# Altium PCB Standard 60 01.PcbDoc
Units mil, origin at the board's own origin, x right, y up, seen from the top; angles counter-clockwise.
Board outline 11157.21 x 3737.43 mil, 2 copper layers (Top Layer, Bottom Layer); 138 components, 95 nets, 535 pads, 25 vias.
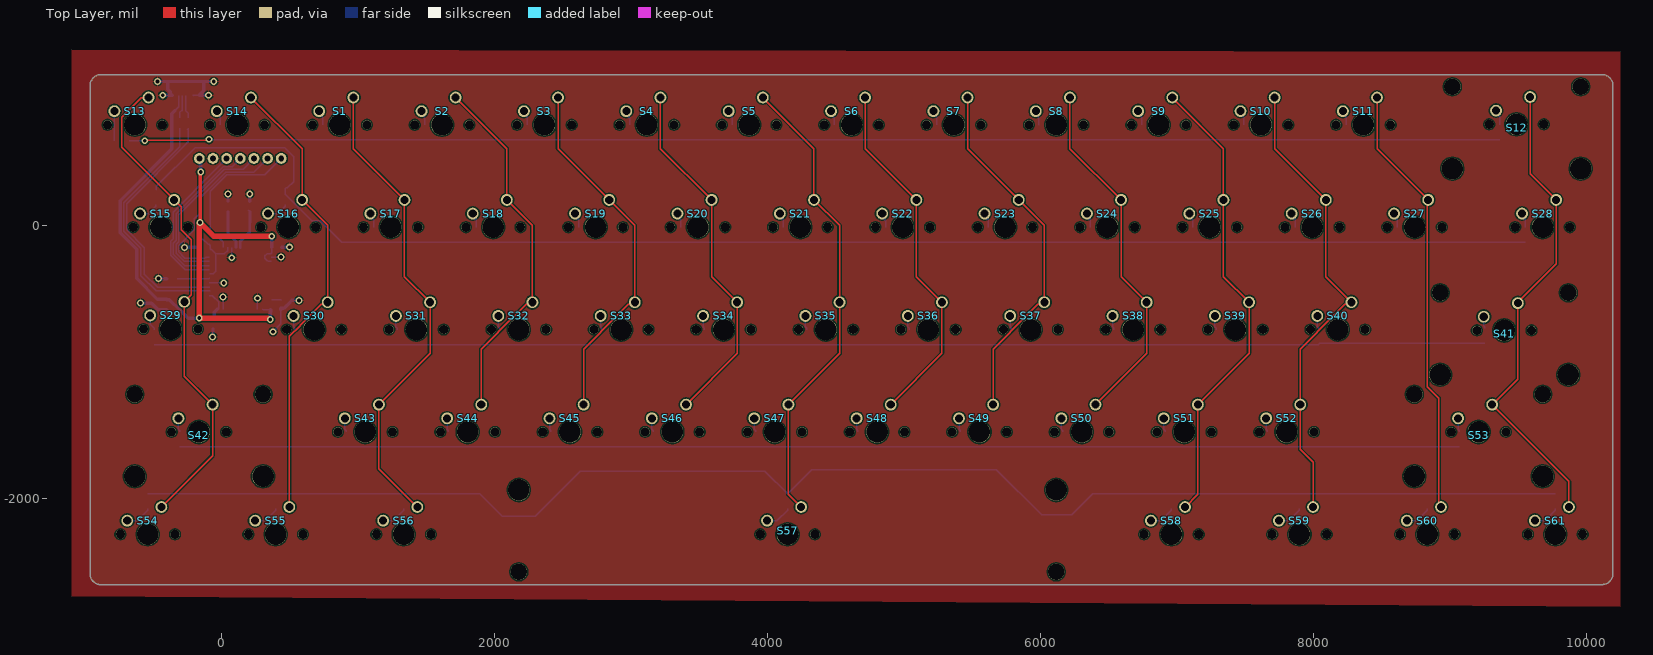
[diagram p0: Top Layer view]
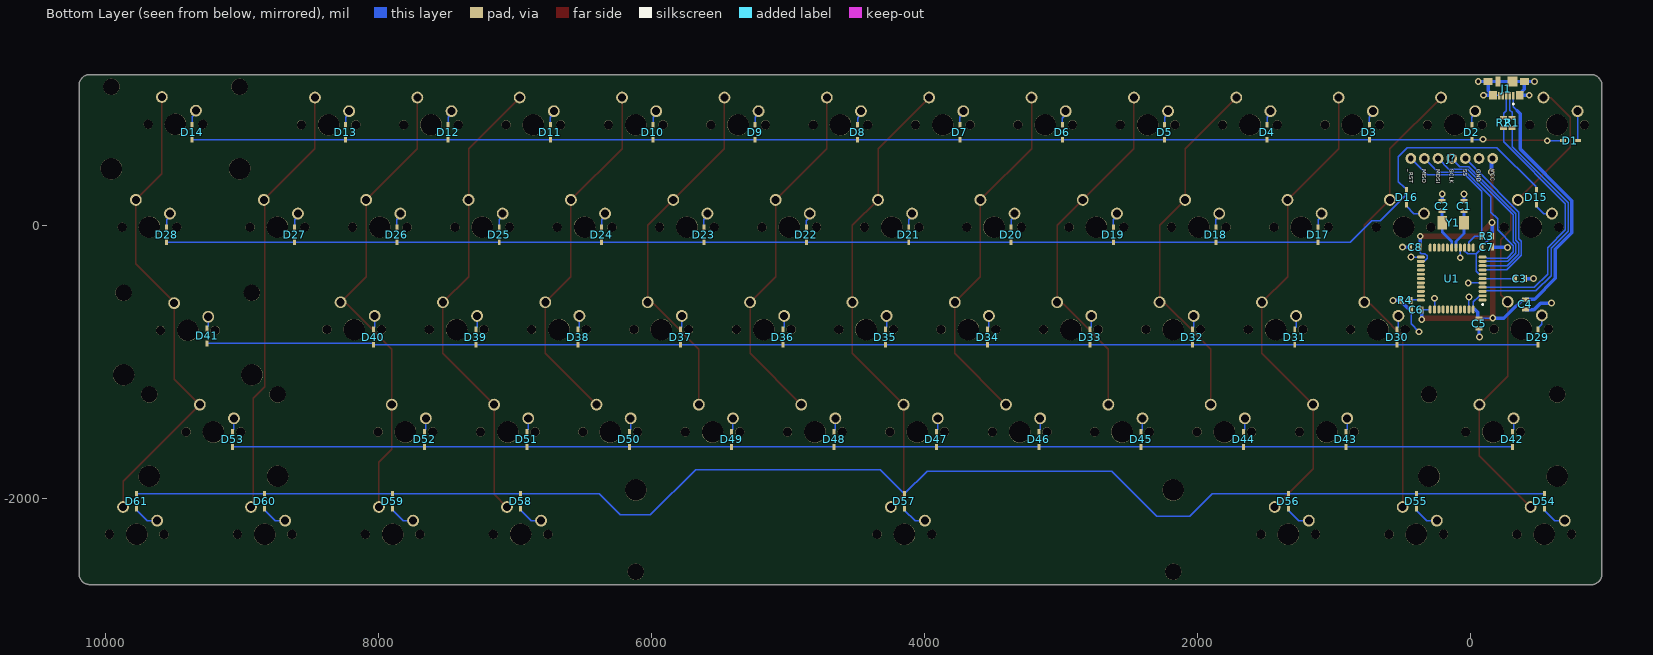
[diagram p1: Bottom Layer view, seen from below]

## Layer stack, top to bottom
Top Solder: solder mask 0.4, Solder Resist, Dk 3.5
Top Layer: signal copper 1.4
Dielectric 1: dielectric 12.6, FR-4, Dk 4.8
Bottom Layer: signal copper 1.4
Bottom Solder: solder mask 0.4, Solder Resist, Dk 3.5

## Board outline
-882.16,-2632.57 cw(c-882.16,-2553.83) -960.9,-2553.82 -960.15,1026.14 cw(c-881.41,1026.12) -881.41,1104.86 10117.57,1104.86 cw(c10117.57,1026.12) 10196.31,1026.12 10196.31,-2553.65 cw(c10117.57,-2553.65) 10117.57,-2632.39

## Design rules (kind name [scope] priority, off if disabled: settings)
Clearance [All] p1: gap=10 ignorepadtopadclearanceinfootprint=TRUE
ComponentClearance [All] p1: gap=10 collisioncheckmode=3 verticalgap=10 showdistances=FALSE donotcheckwithout3dbody=TRUE checkcomponentboundary=TRUE
DiffPairsRouting [All] p1: maxlimit=100 minlimit=10 mostfreqgap=15 toplayer_minwidth=10 toplayer_maxwidth=100 toplayer_prefwidth=15 bottomlayer_minwidth=10 bottomlayer_maxwidth=100 bottomlayer_prefwidth=15 maxuncoupledlength=500
PolygonConnect [All] p1: connectstyle=Relief reliefconductorwidth=10 reliefentries=4 polygonreliefangle="90 Angle" airgapwidth=10
RoutingVias [All] p1: holewidth=27.56 width=47.24 viastyle="Through Hole" minholewidth=19.68 minwidth=39.37 maxholewidth=39.37 maxwidth=59.06
SolderMaskExpansion [All] p1: expansion=4 istentingtop=FALSE
Width [All] p1: maxlimit=1000 minlimit=10 preferedwidth=25
28 further rules are at their usual default settings.

## Classes and differential pairs
net class ROW[5..1]: ROW1 ROW2 ROW3 ROW4 ROW5
net class COL[14..1]: COL1 COL2 COL3 COL4 COL5 COL6 COL7 COL8 COL9 COL10 COL11 COL12 COL13 COL14
component class MCU: C1 C2 C3 C4 C5 C6 C7 C8 J? R1 R2 R3 R4 U1 Y1
component class matrix: D1 D2 D3 D4 D5 D6 D7 D8 D9 D10 D11 D12 D13 D14 D15 D16 D17 D18 D19 D20 D21 D22 D23 D24 D25 D26 D27 D28 D29 D30 D31 D32 D33 D34 D35 D36 D37 D38 D39 D40 D41 D42 D43 D44 D45 D46 D47 D48 D49 D50 D51 D52 D53 D54 D55 D56 D57 D58 D59 D60 D61 S1 S2 S3 S4 S5 S6 S7 S8 S9 S10 S11 S12 S13 S14 S15 S16 S17 S18 S19 S20 S21 S22 S23 S24 S25 S26 S27 S28 S29 S30 S31 S32 S33 S34 S35 S36 S37 S38 S39 S40 S41 S42 S43 S44 S45 S46 S47 S48 S49 S50 S51 S52 S53 S54 S55 S56 S57 S58 S59 S60 S61
differential pair XT: +XT_P -XT_N
differential pair DP: +DP_P -DP_N
differential pair DP1: +DP1_P -DP1_N

## Components (designator, comment, footprint, x,y, rotation, side; value= is the part's Value field where it differs from the comment)
C1 "Cap" 0805 50,140 r270 bottom value=22pf
C2 "Cap" 0805 210,140 r270 bottom value=22pf
C3 "Cap" 0805 -360,-390 r0 bottom value=1uf
C4 "Cap" 0805 -400,-580 r90 bottom value=10uf
C5 "Cap" 0805 -60,-720 r90 bottom value=0.1uf
C6 "Cap" 0805 400,-620 r180 bottom value=0.1uf
C7 "Cap" 0805 -117.5,-160 r0 bottom value=0.1uf
C8 "Cap" 0805 407.5,-160 r180 bottom value=0.1uf
D1 "Diode" SOD-323F -730,620 r180 bottom
D2 "Diode" SOD-323F -6.94,681.18 r90 bottom
D3 "Diode" SOD-323F 743.06,681.18 r90 bottom
D4 "Diode" SOD-323F 1493.06,681.18 r90 bottom
D5 "Diode" SOD-323F 2243.06,681.18 r90 bottom
D6 "Diode" SOD-323F 2993.06,681.18 r90 bottom
D7 "Diode" SOD-323F 3743.06,681.18 r90 bottom
D8 "Diode" SOD-323F 4493.06,681.18 r90 bottom
D9 "Diode" SOD-323F 5243.06,681.18 r90 bottom
D10 "Diode" SOD-323F 5993.06,681.18 r90 bottom
D11 "Diode" SOD-323F 6743.06,681.18 r90 bottom
D12 "Diode" SOD-323F 7493.06,681.18 r90 bottom
D13 "Diode" SOD-323F 8243.06,681.18 r90 bottom
D14 "Diode" SOD-323F 9368.06,681.18 r90 bottom
D15 "Diode" SOD-323F -480,204.88 r270 bottom
D16 "Diode" SOD-323F 470,204.88 r270 bottom
D17 "Diode" SOD-323F 1118.03,-68.82 r90 bottom
D18 "Diode" SOD-323F 1868.03,-68.82 r90 bottom
D19 "Diode" SOD-323F 2618.03,-68.82 r90 bottom
D20 "Diode" SOD-323F 3368.03,-68.82 r90 bottom
D21 "Diode" SOD-323F 4118.03,-68.82 r90 bottom
D22 "Diode" SOD-323F 4868.03,-68.82 r90 bottom
D23 "Diode" SOD-323F 5618.03,-68.82 r90 bottom
D24 "Diode" SOD-323F 6368.03,-68.82 r90 bottom
D25 "Diode" SOD-323F 7118.03,-68.82 r90 bottom
D26 "Diode" SOD-323F 7868.03,-68.82 r90 bottom
D27 "Diode" SOD-323F 8618.03,-68.82 r90 bottom
D28 "Diode" SOD-323F 9555.52,-68.82 r90 bottom
D29 "Diode" SOD-323F -491.35,-818.82 r90 bottom
D30 "Diode" SOD-323F 539.9,-818.82 r90 bottom
D31 "Diode" SOD-323F 1289.9,-818.82 r90 bottom
D32 "Diode" SOD-323F 2039.9,-818.82 r90 bottom
D33 "Diode" SOD-323F 2789.9,-818.82 r90 bottom
D34 "Diode" SOD-323F 3539.9,-818.82 r90 bottom
D35 "Diode" SOD-323F 4289.9,-818.82 r90 bottom
D36 "Diode" SOD-323F 5039.9,-818.82 r90 bottom
D37 "Diode" SOD-323F 5789.9,-818.82 r90 bottom
D38 "Diode" SOD-323F 6539.9,-818.82 r90 bottom
D39 "Diode" SOD-323F 7289.9,-818.82 r90 bottom
D40 "Diode" SOD-323F 8039.9,-818.82 r90 bottom
D41 "Diode" SOD-323F 9258.65,-810.58 r90 bottom
D42 "Diode" SOD-323F -303.85,-1568.82 r90 bottom
D43 "Diode" SOD-323F 914.9,-1568.82 r90 bottom
D44 "Diode" SOD-323F 1664.9,-1568.82 r90 bottom
D45 "Diode" SOD-323F 2414.9,-1568.82 r90 bottom
D46 "Diode" SOD-323F 3164.9,-1568.82 r90 bottom
D47 "Diode" SOD-323F 3914.9,-1568.82 r90 bottom
D48 "Diode" SOD-323F 4664.9,-1568.82 r90 bottom
D49 "Diode" SOD-323F 5414.9,-1568.82 r90 bottom
D50 "Diode" SOD-323F 6164.9,-1568.82 r90 bottom
D51 "Diode" SOD-323F 6914.9,-1568.82 r90 bottom
D52 "Diode" SOD-323F 7664.9,-1568.82 r90 bottom
D53 "Diode" SOD-323F 9071.15,-1568.82 r90 bottom
D54 "Diode" SOD-323F -538.23,-2021.09 r270 bottom
D55 "Diode" SOD-323F 399.27,-2021.09 r270 bottom
D56 "Diode" SOD-323F 1336.77,-2021.09 r270 bottom
D57 "Diode" SOD-323F 4149.27,-2021.09 r270 bottom
D58 "Diode" SOD-323F 6961.77,-2021.09 r270 bottom
D59 "Diode" SOD-323F 7899.27,-2021.09 r270 bottom
D60 "Diode" SOD-323F 8836.77,-2021.09 r270 bottom
D61 "Diode" SOD-323F 9774.27,-2021.09 r270 bottom
J1 "Molex 473460001" "MOLEX 47346 0001" -260,1040 r0 bottom
J? "ISP HEADER" "SPI HEADER" -160,490 r270 bottom
R1 "Res" 0805 -302.99,750 r270 bottom value=22
R2 "Res" 0805 -240,750 r270 bottom value=22
R3 "Res" 0805 -117.5,-80 r0 bottom value=10k
R4 "Res" 0805 480,-550 r0 bottom value=10k
S1 "1u" MX1U 868.06,736.3 r0 top
S2 "1u" MX1U 1618.03,736.3 r0 top
S3 "1u" MX1U 2368.06,736.3 r0 top
S4 "1u" MX1U 3118.06,736.3 r0 top
S5 "1u" MX1U 3868.06,736.3 r0 top
S6 "1u" MX1U 4618.06,736.3 r0 top
S7 "1u" MX1U 5368.02,736.3 r0 top
S8 "1u" MX1U 6118.06,736.3 r0 top
S9 "1u" MX1U 6868.02,736.3 r0 top
S10 "1u" MX1U 7618.06,736.3 r0 top
S11 "1u" MX1U 8368.06,736.3 r0 top
S12 "2u" MX2U 9490,740 r0 top
S13 "1u" MX1U -631.94,736.3 r0 top
S14 "1u" MX1U 118.06,736.3 r0 top
S15 "1u" MX1U -444.42,-13.7 r0 top
S16 "1u" MX1U 493.03,-13.7 r0 top
S17 "1u" MX1U 1243.06,-13.7 r0 top
S18 "1u" MX1U 1993.06,-13.7 r0 top
S19 "1u" MX1U 2743.06,-13.7 r0 top
S20 "1u" MX1U 3493.02,-13.7 r0 top
S21 "1u" MX1U 4243.03,-13.7 r0 top
S22 "1u" MX1U 4993.02,-13.7 r0 top
S23 "1u" MX1U 5743.06,-13.7 r0 top
S24 "1u" MX1U 6493.06,-13.7 r0 top
S25 "1u" MX1U 7243.02,-13.7 r0 top
S26 "1u" MX1U 7993.06,-13.7 r0 top
S27 "1u" MX1U 8743.02,-13.7 r0 top
S28 "1u" MX1U 9680.52,-13.7 r0 top
S29 "1u" MX1U -370,-760 r0 top
S30 "1u" MX1U 680.59,-763.73 r0 top
S31 "1u" MX1U 1430.5,-763.73 r0 top
S32 "1u" MX1U 2180.53,-763.73 r0 top
S33 "1u" MX1U 2930.53,-763.73 r0 top
S34 "1u" MX1U 3680.52,-763.73 r0 top
S35 "1u" MX1U 4430.52,-763.73 r0 top
S36 "1u" MX1U 5180.52,-763.73 r0 top
S37 "1u" MX1U 5930.58,-763.73 r0 top
S38 "1u" MX1U 6680.52,-763.73 r0 top
S39 "1u" MX1U 7430.58,-763.73 r0 top
S40 "1u" MX1U 8180.58,-763.73 r0 top
S41 "2u" MX2U 9400,-770 r0 top
S42 "2u" MX2U -163.22,-1513.71 r0 top
S43 "1u" MX1U 1055.59,-1513.71 r0 top
S44 "1u" MX1U 1805.59,-1513.71 r0 top
S45 "1u" MX1U 2555.59,-1513.71 r0 top
S46 "1u" MX1U 3305.52,-1513.71 r0 top
S47 "1u" MX1U 4055.58,-1513.71 r0 top
S48 "1u" MX1U 4805.52,-1513.71 r0 top
S49 "1u" MX1U 5555.58,-1513.71 r0 top
S50 "1u" MX1U 6305.58,-1513.71 r0 top
S51 "1u" MX1U 7055.52,-1513.71 r0 top
S52 "1u" MX1U 7805.58,-1513.71 r0 top
S53 "2u" MX2U 9211.78,-1513.71 r0 top
S54 "1u" MX1U -538.19,-2263.7 r0 top
S55 "1u" MX1U 399.28,-2263.7 r0 top
S56 "1u" MX1U 1336.81,-2263.7 r0 top
S57 "6.25u" "MX6.25U FLIPPED STAB" 4149.32,-2263.7 r0 top
S58 "1u" MX1U 6961.78,-2263.7 r0 top
S59 "1u" MX1U 7899.32,-2263.7 r0 top
S60 "1u" MX1U 8836.78,-2263.7 r0 top
S61 "1u" MX1U 9774.28,-2263.7 r0 top
U1 "ATmega32U4" TQFP44 140,-390 r0 bottom
Y1 "XTAL" ABM3 130,20 r0 bottom value=16MHz

## Footprints (in the part's own frame and the unit in brackets; to place one, negate y for a bottom-side part, rotate by r counter-clockwise, add the part's x,y. Pads: shape width x height; smd on the part's side, far side on the other; paste and mask are expansions set on the pad)
0805 [mil]
  rect 28x51 smd: 1(-37.5,0) 2(37.5,0)
ABM3 [mil] "ABRACON SMD XTAL PACKAGE"
  rect 70x100 smd: 1(-80,0) 2(80,0)
"MOLEX 47346 0001" [mm]
  rect 0.45x1.38 smd paste+0 mask+0: 1(-1.3,2.31) 2(-0.65,2.31) 3(0,2.31) 4(0.65,2.31) 5(1.3,2.31)
  rect 1.425x1.55 smd paste+0 mask+0: 6(-2.488,2.225) 7(2.488,2.225)
  rect 1.65x1.3 smd paste+0 mask+0: 8(-3.375,-0.35) 11(3.375,-0.35)
  rect 1.8x1.9 smd paste+0 mask+0: 9(-1.15,-0.35)
  rect 1x1.9 smd paste+0 mask+0: 10(1.55,-0.35)
  silkscreen extent -1.45,3.73 -1.2,3.97
MX1U [mm]
  round 2.2 hole 1.5: 1(2.54,5.08) 2(-3.81,2.54)
  round 1.7 hole 1.7 unplated: ""(-5.08,0) ""(5.08,0)
  round 4 hole 4 unplated: ""(0,0)
MX2U [mil]
  round 86.61 hole 59.06: 1(100,200) 2(-150,100)
  round 157 hole 157 unplated: ""(-470,-325) ""(470,-325)
  round 120 hole 120 unplated: ""(-470,275) ""(470,275)
  round 66.93 hole 66.93 unplated: ""(-200,0) ""(200,0)
  round 157.48 hole 157.48 unplated: ""(0,0)
"MX6.25U FLIPPED STAB" [mm]
  round 2.2 hole 1.5: 1(2.54,5.08) 2(-3.81,2.54)
  round 3.048 hole 3.048 unplated: ""(-50,-6.985) ""(50,-6.985)
  round 3.988 hole 3.988 unplated: ""(-50,8.255) ""(50,8.255)
  round 1.7 hole 1.7 unplated: ""(-5.08,0) ""(5.08,0)
  round 4 hole 4 unplated: ""(0,0)
SOD-323F [mm]
  rect 1.05x0.55 smd: 1(-1.4,0) 2(1.4,0)
"SPI HEADER" [mm]
  round 2 hole 1.1: 1(0,0) 2(0,-2.54) 3(0,-5.08) 4(0,-7.62) 5(0,-10.16) 6(0,-12.7) 7(0,-15.24)
TQFP44 [mm] "TQFP, 44-Leads, Body 10.00x10.00mm"
  oval 1.5x0.55 smd: 1(-5.75,4) 2(-5.75,3.2) 3(-5.75,2.4) 4(-5.75,1.6) 5(-5.75,0.8) 6(-5.75,0) 7(-5.75,-0.8) 8(-5.75,-1.6) 9(-5.75,-2.4) 10(-5.75,-3.2) 11(-5.75,-4) 23(5.75,-4) 24(5.75,-3.2) 25(5.75,-2.4) 26(5.75,-1.6) 27(5.75,-0.8) 28(5.75,0) 29(5.75,0.8) 30(5.75,1.6) 31(5.75,2.4) 32(5.75,3.2) 33(5.75,4)
  oval 0.55x1.5 smd: 12(-4,-5.75) 13(-3.2,-5.75) 14(-2.4,-5.75) 15(-1.6,-5.75) 16(-0.8,-5.75) 17(0,-5.75) 18(0.8,-5.75) 19(1.6,-5.75) 20(2.4,-5.75) 21(3.2,-5.75) 22(4,-5.75) 34(4,5.75) 35(3.2,5.75) 36(2.4,5.75) 37(1.6,5.75) 38(0.8,5.75) 39(0,5.75) 40(-0.8,5.75) 41(-1.6,5.75) 42(-2.4,5.75) 43(-3.2,5.75) 44(-4,5.75)
  silkscreen extent -5.87,4.7 -5.63,4.95

## Part data
C1 C2 C3 C4 C5 C6 C7 C8: "Capacitor"
J1: "Micro usb receptacle"
R1 R2 R3 R4: "Resistor"
  R1: LatestRevisionDate=17-Jul-2002, LatestRevisionNote="Re-released for DXP Platform.", PackageDescription="Axial Device, Thru-Hole; 2 Leads; 0.4 in Pin Spacing", PackageReference=AXIAL-0.4, Published=8-Jun-2000, Publisher="Altium Limited"
S1 S2 S3 S4 S5 S6 S7 S8 S9 S10 S11 S13 S14 S15 S16 S17 S18 S19 S20 S21 S22 S23 S24 S25 S26 S27 S28 S29 S30 S31 S32 S33 S34 S35 S36 S37 S38 S39 S40 S43 S44 S45 S46 S47 S48 S49 S50 S51 S52 S54 S55 S56 S58 S59 S60 S61: "1-2u Mx Switch"
S12 S41 S42 S53: "2-3u Mx Switch with pcb mount stabs"
S57: "6.25u Mx Switch with pcb mount stabs"
U1: "8-bit AVR Microcontroller", Manufacturer="Microchip / Atmel", Manufacturer Part Number=ATMEGA32U4-AU, ComponentLink1Description="Manufacturer URL", ComponentLink1URL=http://www.atmel.com/, ComponentLink2Description="ATmega16U4/32U4 Datasheet", ComponentLink2URL=http://www.atmel.com/dyn/resources/prod_documents/doc7766.pdf, ComponentLink3Description="ATmega16U4 ATmega32U4 Summary", ComponentLink3URL=http://www.atmel.com/dyn/resources/prod_documents/7766S.pdf, DatasheetVersion="revF, Nov-2010", PackageDescription="44-Pin Plastic Thin Quad Flat Pack, 10 x 10 x 1.0 mm Body, 0.8 mm Pitch (TQFP)", PackageReference=44ML, PackageVersion="rev.G, Jul-2007", RevisionNote="DatasheetVersion updated. URLs added."
Y1: "Crystal Oscillator"

## Via types
v1: diameter 50, hole 28, Top Layer to Bottom Layer, 25 vias

## Nets (pads, with @x,y where several pads share a name; then routed paths per layer and width w, separated by ;. In a path a pad name is that pad's centre, name@x,y a point inside that pad or via, vN(x,y) a via of type N, cw(c..) or ccw(c..) an arc to the next point about the centre after c; other vN are vias at no path point)
\R\E\S\E\T\: J?.7 R3.2 U1.13 | length 1097.1
  Bottom Layer w10: U1.13@15.41,-158.87 15.41,-125.41 -30,-80 R3.2 -80,250 40,370 320,370 J?.7
COL1: S13.1 S15.1 S29.1 S42.1 S54.1 | length 3624.2
  Top Layer w10: S13.1 -532.64,935.61 -584.39,935.61 -730,790 -730,571.88 S15.1 -292.88,134.76 -292.88,-33.78 -220,-106.66 -220,-510 S29.1 -270,-1106.93 S42.1 -63.22,-1688.73 S54.1
  Bottom Layer w10: S29.1@-270,-578.21 S29.1 ; S42.1@-77.88,-1328.36 S42.1
COL2: S14.1 S16.1 S30.1 S55.1 | length 3389.3
  Top Layer w10: S14.1 593.03,561.32 S16.1 780.59,-1.26 S30.1 765.93,-578.39 733.36,-578.39 577.85,-733.9 577.85,-735.01 499.28,-813.58 S55.1
  Bottom Layer w10: S30.1@765.93,-578.39 S30.1
COL3: S1.1 S17.1 S31.1 S43.1 S56.1 | length 3504.8
  Top Layer w10: S1.1 968.06,561.3 S17.1 1343.06,-376.29 S31.1 1530.5,-938.79 S43.1 1155.59,-1782.48 S56.1
COL4: S2.1 S18.1 S32.1 S44.1 | length 2678.1
  Top Layer w10: S2.1 2093.06,561.27 S18.1 2280.53,-1.18 S32.1 2265.87,-578.39 2233.3,-578.39 2030.97,-780.72 2030.97,-781.83 1905.59,-907.21 S44.1
  Bottom Layer w10: S32.1@2265.87,-578.39 S32.1
COL5: S3.1 S19.1 S33.1 S45.1 | length 2657.4
  Top Layer w10: S3.1 2468.06,561.3 S19.1 3030.53,-1.17 S33.1 3015.88,-578.39 2983.31,-578.39 2780.98,-780.72 2780.98,-781.83 2655.59,-907.22 S45.1
COL6: S4.1 S20.1 S34.1 S46.1 | length 2638.3
  Top Layer w10: S4.1 3218.06,561.26 S20.1 3593.02,-376.23 S34.1 3780.52,-938.71 S46.1
COL7: S5.1 S21.1 S35.1 S47.1 S57.1 | length 3427.1
  Top Layer w10: S5.1 4343.03,561.33 S21.1 4530.52,-1.2 S35.1 4530.52,-938.76 S47.1 4155.58,-1969.96 S57.1
COL8: S6.1 S22.1 S36.1 S48.1 | length 2659
  Top Layer w10: S6.1 4718.06,561.26 S22.1 5093.02,-376.23 S36.1 5280.52,-938.71 S48.1
  Bottom Layer w10: S36.1@5265.87,-578.39 S36.1
COL9: S7.1 S23.1 S37.1 S49.1 | length 2674.8
  Top Layer w10: S7.1@5475.72,920.92 5468.02,913.22 5468.02,561.34 S23.1 ; S49.1 5655.58,-907.27 5781,-781.85 5781,-780.75 5983.36,-578.39 6015.92,-578.39 S37.1 6030.58,-1.22 5850.73,178.63 S23.1@5850.73,198.34
  Bottom Layer w10: S37.1@6015.92,-578.39 S37.1
COL10: S8.1 S24.1 S38.1 S50.1 | length 2659.9
  Top Layer w10: S8.1 6218.06,561.3 S24.1 6593.06,-376.27 S38.1 6780.52,-938.76 6414.15,-1305.14 S50.1@6414.15,-1318.16
  Bottom Layer w10: S38.1@6765.87,-578.39 S38.1
COL11: S9.1 S25.1 S39.1 S51.1 S58.1 | length 3427.2
  Top Layer w10: S9.1 7343.02,561.3 S25.1 7343.02,-376.17 S39.1 7530.58,-938.65 S51.1 7155.52,-1969.96 S58.1
COL12: S10.1 S26.1 S40.1 S52.1 S59.1 | length 3446.2
  Top Layer w10: S10.1 7718.06,561.3 S26.1 8093.06,-376.21 S40.1 8265.92,-578.39 8233.36,-578.39 8031,-780.75 8031,-781.85 7905.58,-907.27 S52.1 7905.58,-1641.83 7999.32,-1735.57 S59.1
COL13: S11.1 S27.1 S60.1 | length 3201.9
  Top Layer w10: S11.1 8468.06,561.26 S27.1 8835.75,179.02 8835.75,26.14 8836.76,25.12 8836.76,-52.53 8835.75,-53.55 8835.75,-1182.64 8889.22,-1236.12 8912.6,-1259.49 8914.14,-1259.49 8920,-1265.35 8920,-2019.54 8922.12,-2021.66 8922.12,-2049.04 S60.1
COL14: S12.1 S28.1 S41.1 S53.1 S61.1 | length 3539.4
  Top Layer w10: S12.1 9590,376.82 S28.1 9780.52,-282.45 9499.25,-563.73 9499.25,-1126.24 S53.1 9874.28,-1876.21 S61.1
  Bottom Layer w10: S53.1@9305.5,-1307.43 S53.1 ; S41.1@9484.59,-578.39 S41.1@9499.25,-563.73
DP1_N: R1.2 U1.3 | length 1854.1
  Bottom Layer w10: R1.2 -302.99,577.01 -712.88,167.12 -712.88,-42.06 -587.5,-167.44 -587.5,-367.86 -476.63,-478.72 -112.94,-478.72 -111.93,-479.74 -84.99,-479.74 U1.3@-82.76,-481.97
DP1_P: R2.2 U1.4 | length 1843.5
  Bottom Layer w10: R2.2@-250,708.5 R2.2@-240,698.5 ; R2.2 R2.2@-240,698.5 ; U1.4@-84.99,-452.7 -111.93,-452.7 -112.94,-453.72 -466.28,-453.72 -562.5,-357.5 -562.5,-164.16 -692.88,-33.78 -692.88,158.83 -240,611.72 R2.2@-240,698.5
DP_N: J1.2 R1.1 | length 168.8
  Bottom Layer w10: R1.1 -302.99,827.01 -285.59,844.41 J1.2
DP_P: J1.3 R2.1 | length 169.8
  Bottom Layer w10: J1.3 -260,840 -240,820 R2.1
GND: C1.1 C2.1 C3.1 C4.1 C5.1 C6.1 C7.1 C8.1 J1.5 J1.6 J1.7 J1.8 J1.9 J1.10 J1.11 J?.2 R4.2 U1.5 U1.15 U1.23 U1.35 U1.43 | length 2195.6
  Bottom Layer w10: J1.5 -205.47,952.4 J1.7 ; U1.5 v1(18.5,-421.5) ; U1.43 v1(14.02,-525.98) ; v1(77.01,-237.01) U1.15 ; U1.35 v1(265.98,-534.02) ; U1.23 v1(437.48,-232.52) ; v1(380,-780) 437.5,-722.5 C6.1
  Bottom Layer w25: v1(-590,-570) -510.5,-570 -463,-617.5 C4.1 ; v1(-466.22,1053.78) J1.8 ; v1(-460,-390) C3.1 ; v1(-427.6,952.4) J1.6 -373.48,967.95 -373.48,978.29 -392.87,997.68 J1.8 ; v1(-267.57,-162.43) -266.36,-161.21 -156.21,-161.21 C7.1 ; v1(-92.4,952.4) J1.7 -162.07,954.86 -146.52,970.41 -144.06,970.41 -127.13,987.34 J1.11 ; v1(-62.5,-817.5) -60,-815 C5.1 ; v1(-53.78,1053.78) J1.11 ; C1.1 v1(50,230) ; C2.1 v1(210,230) ; C6.1 437.5,-608.5 439,-607 460.5,-607 R4.2@504.5,-563 ; C8.1 v1(500,-160) ; R4.2 v1(570,-550) ; J1.8 J1.9 J1.10 J1.11
HWB: R4.1 U1.33 | length 74.6
  Bottom Layer w10: U1.33@370,-544.96 437.46,-544.96 R4.1
MISO: J?.6 U1.11 | length 1321.7
  Bottom Layer w10: U1.11 -108.23,-232.52 -113.98,-238.27 -115.86,-238.27 -117.59,-240 -265.15,-240 -310,-195.15 -310,-148.28 -195.95,-34.24 -195.95,47.06 -147.43,95.59 -147.43,210.85 31.72,390 240,390 J?.6
MOSI: J?.5 U1.10 | length 1278.2
  Bottom Layer w10: U1.10 -269.42,-264.02 -330,-203.43 -330,-140 -310.68,-120.68 -310.68,75.89 23.43,410 160,410 J?.5
NetD1_2: D1.2 S13.2 | length 217.6
  Bottom Layer w10: D1.2 -781.94,623.17 S13.2
NetD2_2: D2.2 S14.2 | length 110.4
  Bottom Layer w10: S14.2 -31.94,817.13 -6.94,792.13 D2.2
NetD3_2: D3.2 S1.2 | length 110.4
  Bottom Layer w10: S1.2 718.06,817.13 743.06,792.13 D3.2
NetD4_2: D4.2 S2.2 | length 110.4
  Bottom Layer w10: S2.2 1468.03,817.16 1493.06,792.13 D4.2
NetD5_2: D5.2 S3.2 | length 110.4
  Bottom Layer w10: S3.2 2218.06,817.13 2243.06,792.13 D5.2
NetD6_2: D6.2 S4.2 | length 110.4
  Bottom Layer w10: S4.2 2982.72,821.64 2982.72,795.16 2993.06,784.83 D6.2
NetD7_2: D7.2 S5.2 | length 110.4
  Bottom Layer w10: S5.2 3718.06,815.56 3743.06,790.57 D7.2
NetD8_2: D8.2 S6.2 | length 110.4
  Bottom Layer w10: S6.2 4482.72,821.64 4482.72,795.16 4493.06,784.83 D8.2
NetD9_2: D9.2 S7.2 | length 110.4
  Bottom Layer w10: S7.2 5218.02,817.16 5243.06,792.13 D9.2
NetD10_2: D10.2 S8.2 | length 110.4
  Bottom Layer w10: S8.2 5968.06,815.68 5991.61,792.13 5991.61,737.74 D10.2
NetD11_2: D11.2 S9.2 | length 110.4
  Bottom Layer w10: S9.2 6718.02,817.16 6743.06,792.13 D11.2
NetD12_2: D12.2 S10.2 | length 110.4
  Bottom Layer w10: S10.2 7468.06,817.12 7493.06,792.13 D12.2
NetD13_2: D13.2 S11.2 | length 110.4
  Bottom Layer w10: S11.2 8218.06,817.12 8243.06,792.13 D13.2
NetD14_2: D14.2 S12.2 | length 110.4
  Bottom Layer w10: S12.2@9343.02,836.3 9343.02,820.87 9368.06,795.84 D14.2
NetD15_2: D15.2 S15.2 | length 146.6
  Bottom Layer w10: S15.2 -533.86,86.3 -480,140.16 D15.2@-480,150
NetD16_2: D16.2 S16.2 | length 159
  Bottom Layer w10: S16.2 416.38,86.3 470,139.92 D16.2
NetD17_2: D17.2 S17.2 | length 110.3
  Bottom Layer w10: S17.2 1093.06,67.1 1118.03,42.13 D17.2
NetD18_2: D18.2 S18.2 | length 110.3
  Bottom Layer w10: S18.2 1843.06,66.02 1866.94,42.13 1866.94,-12.62 D18.2
NetD19_2: D19.2 S19.2 | length 110
  Bottom Layer w10: S19.2@2592.57,85.8 2592.57,67.59 2618.03,42.13 D19.2
NetD20_2: D20.2 S20.2 | length 110.4
  Bottom Layer w10: S20.2 3343.02,67.13 3368.03,42.13 D20.2
NetD21_2: D21.2 S21.2 | length 110.4
  Bottom Layer w10: S21.2 4093.03,67.13 4118.03,42.13 D21.2
NetD22_2: D22.2 S22.2 | length 110.4
  Bottom Layer w10: S22.2 4857.68,71.64 4857.68,43.26 4868.03,32.91 D22.2
NetD23_2: D23.2 S23.2 | length 110.3
  Bottom Layer w10: S23.2 5593.06,67.09 5618.03,42.13 D23.2
NetD24_2: D24.2 S24.2 | length 110.3
  Bottom Layer w10: S24.2 6343.06,67.09 6368.03,42.13 D24.2
NetD25_2: D25.2 S25.2 | length 110.4
  Bottom Layer w10: S25.2 7093.02,67.13 7118.03,42.13 D25.2
NetD26_2: D26.2 S26.2 | length 110.3
  Bottom Layer w10: S26.2 7843.06,67.09 7868.03,42.13 D26.2
NetD27_2: D27.2 S27.2 | length 110.4
  Bottom Layer w10: S27.2 8593.02,67.13 8618.03,42.13 D27.2
NetD28_2: D28.2 S28.2 | length 110.4
  Bottom Layer w10: S28.2 9530.52,67.13 9555.52,42.13 D28.2
NetD29_2: D29.2 S29.2 | length 115.6
  Bottom Layer w10: S29.2 -520,-725.21 -491.35,-753.86 D29.2
NetD30_2: D30.2 S30.2 | length 103.8
  Bottom Layer w10: S30.2 530.59,-744.55 539.9,-753.86 D30.2
NetD31_2: D31.2 S31.2 | length 103.9
  Bottom Layer w10: S31.2 1280.5,-744.46 1289.9,-753.86 D31.2
NetD32_2: D32.2 S32.2 | length 103.9
  Bottom Layer w10: S32.2 2030.53,-744.49 2039.9,-753.86 D32.2
NetD33_2: D33.2 S33.2 | length 103.9
  Bottom Layer w10: S33.2 2780.53,-744.5 2789.9,-753.86 D33.2
NetD34_2: D34.2 S34.2 | length 103.9
  Bottom Layer w10: S34.2 3530.52,-744.49 3539.9,-753.86 D34.2
NetD35_2: D35.2 S35.2 | length 103.9
  Bottom Layer w10: S35.2 4280.52,-744.49 4289.9,-753.86 D35.2
NetD36_2: D36.2 S36.2 | length 103.9
  Bottom Layer w10: S36.2 5030.52,-744.49 5039.9,-753.86 D36.2
NetD37_2: D37.2 S37.2 | length 103.8
  Bottom Layer w10: S37.2 5780.58,-744.54 5789.9,-753.86 D37.2
NetD38_2: D38.2 S38.2 | length 103.9
  Bottom Layer w10: S38.2 6530.52,-744.49 6539.9,-753.86 D38.2
NetD39_2: D39.2 S39.2 | length 103.8
  Bottom Layer w10: S39.2 7280.58,-744.54 7289.9,-753.86 D39.2
NetD40_2: D40.2 S40.2 | length 103.8
  Bottom Layer w10: S40.2 8030.58,-744.54 8039.9,-753.86 D40.2
NetD41_2: D41.2 S41.2 | length 95.6
  Bottom Layer w10: S41.2@9249.25,-663.73 9249.25,-736.21 9258.65,-745.62 D41.2
NetD42_2: D42.2 S42.2 | length 103.9
  Bottom Layer w10: S42.2 -313.22,-1494.49 -303.85,-1503.86 D42.2
NetD43_2: D43.2 S43.2 | length 103.9
  Bottom Layer w10: S43.2 905.59,-1494.55 914.9,-1503.86 D43.2
NetD44_2: D44.2 S44.2 | length 103.9
  Bottom Layer w10: S44.2 1655.59,-1494.55 1664.9,-1503.86 D44.2
NetD45_2: D45.2 S45.2 | length 103.9
  Bottom Layer w10: S45.2 2405.59,-1494.55 2414.9,-1503.86 D45.2
NetD46_2: D46.2 S46.2 | length 103.9
  Bottom Layer w10: S46.2 3155.52,-1494.49 3164.9,-1503.86 D46.2
NetD47_2: D47.2 S47.2 | length 103.9
  Bottom Layer w10: S47.2 3905.58,-1494.54 3914.9,-1503.86 D47.2
NetD48_2: D48.2 S48.2 | length 103.9
  Bottom Layer w10: S48.2 4655.52,-1494.49 4664.9,-1503.86 D48.2
NetD49_2: D49.2 S49.2 | length 103.9
  Bottom Layer w10: S49.2 5405.58,-1494.54 5414.9,-1503.86 D49.2
NetD50_2: D50.2 S50.2 | length 103.9
  Bottom Layer w10: S50.2 6155.58,-1494.54 6164.9,-1503.86 D50.2
NetD51_2: D51.2 S51.2 | length 103.9
  Bottom Layer w10: S51.2 6905.52,-1494.49 6914.9,-1503.86 D51.2
NetD52_2: D52.2 S52.2 | length 103.9
  Bottom Layer w10: S52.2 7655.58,-1494.54 7664.9,-1503.86 D52.2
NetD53_2: D53.2 S53.2 | length 103.9
  Bottom Layer w10: S53.2 9061.78,-1494.5 9071.15,-1503.86 D53.2
NetD54_2: D54.2 S54.2 | length 192
  Bottom Layer w10: S54.2 -615.88,-2163.7 -538.23,-2086.05 D54.2
NetD55_2: D55.2 S55.2 | length 192
  Bottom Layer w10: S55.2 321.62,-2163.7 399.27,-2086.05 D55.2
NetD56_2: D56.2 S56.2 | length 192
  Bottom Layer w10: S56.2 1259.12,-2163.7 1336.77,-2086.05 D56.2
NetD57_2: D57.2 S57.2 | length 192
  Bottom Layer w10: S57.2 4071.62,-2163.7 4149.27,-2086.05 D57.2
NetD58_2: D58.2 S58.2 | length 192
  Bottom Layer w10: S58.2 6884.12,-2163.7 6961.77,-2086.05 D58.2
NetD59_2: D59.2 S59.2 | length 192
  Bottom Layer w10: S59.2 7821.62,-2163.7 7899.27,-2086.05 D59.2
NetD60_2: D60.2 S60.2 | length 192
  Bottom Layer w10: S60.2 8759.12,-2163.7 8836.77,-2086.05 D60.2
NetD61_2: D61.2 S61.2 | length 192
  Bottom Layer w10: S61.2 9696.62,-2163.7 9774.27,-2086.05 D61.2
ROW1: D1.1 D2.1 D3.1 D4.1 D5.1 D6.1 D7.1 D8.1 D9.1 D10.1 D11.1 D12.1 D13.1 D14.1 | length 10048.7
  Top Layer w10: v1(-560,620) -555,625 -95,625 v1(-90,630)
  Bottom Layer w10: D1.1 v1(-560,620) ; v1(-90,630) -86.06,626.06 D2.1 D3.1 D4.1 D5.1 D6.1 D7.1 D8.1 D9.1 D10.1 D11.1 D12.1 D13.1 D14.1
ROW2: D15.1 D16.1 D17.1 D18.1 D19.1 D20.1 D21.1 D22.1 D23.1 D24.1 D25.1 D26.1 D27.1 D28.1 | length 10716.1
  Bottom Layer w10: D15.1 -474.17,265.83 -474.17,285.83 -190,570 464.14,570 530,504.14 530,320 485.67,275.67 475.83,275.67 470,269.84 D16.1 470,226.87 662.11,34.76 725.24,34.76 883.94,-123.94 D18.1 D19.1 D20.1 D21.1 D22.1 D23.1 D24.1 D25.1 D26.1 D27.1 D28.1
ROW3: D29.1 D30.1 D31.1 D32.1 D33.1 D34.1 D35.1 D36.1 D37.1 D38.1 D39.1 D40.1 D41.1 | length 9753.5
  Bottom Layer w10: D29.1 D30.1 D31.1 D32.1 D33.1 D34.1 D35.1 D36.1 D37.1 D38.1 ; D38.1@6541.83,-872.53 6543.24,-873.94 D39.1 D40.1 8039.9,-871.52 8045.73,-865.7 D41.1
ROW4: D42.1 D43.1 D44.1 D45.1 D46.1 D47.1 D48.1 D49.1 D50.1 D51.1 D52.1 D53.1 | length 9375
  Bottom Layer w10: D42.1 D43.1 D44.1 D45.1 D46.1 D47.1 D48.1 D49.1 D50.1 D51.1 D52.1 D53.1
ROW5: D54.1 D55.1 D56.1 D57.1 D58.1 D59.1 D60.1 D61.1 | length 10859.9
  Bottom Layer w10: D54.1 D55.1 D56.1 1895.97,-1965.97 2060,-2130 2300,-2130 2630,-1800 3983.31,-1800 D57.1 4325.96,-1789.28 5679.28,-1789.28 6010,-2120 6230,-2120 6384.03,-1965.97 D58.1 D59.1 D60.1 D61.1
SCLK: J?.4 U1.9 | length 1241
  Bottom Layer w10: U1.9 -266.2,-295.51 -350,-211.72 -350,-130 -330.68,-110.68 -330.68,84.17 15.15,430 80,430 J?.4
SS: J?.3 U1.8 | length 1207.8
  Bottom Layer w10: U1.8 -262.99,-327.01 -370,-220 -370,-118.06 -350.68,-98.73 -350.68,97.58 -41.63,406.62 -41.63,408.37 J?.3
UCAP: C3.2 U1.6 | length 239.7
  Bottom Layer w10: C3.2 U1.6 ; U1.6@-86.38,-387.48 U1.6@-82.76,-387.48
VCC: C4.2 C5.2 C6.2 C7.2 C8.2 J1.1 J?.1 R3.1 U1.2 U1.7 U1.14 U1.24 U1.34 U1.44 | length 5730.5
  Top Layer w25: v1@-160.43,-679.57 v1(-160,-680) v1@-159.69,-679.69 ; v1@-160.43,16.73 v1@-156.23,20.94 ; v1(-155.95,21.21) v1@-156.23,20.94 ; v1(-150,390) -152.98,387.02 -152.98,24.19 v1@-156.23,20.94 ; v1@342.93,-679.69 353.24,-690 v1(360,-690)
  Top Layer w40: v1@-160.43,-679.57 v1@-160.43,16.73 ; v1@-159.69,-679.69 v1@342.93,-679.69 ; v1@-156.23,20.94 -55.29,-80 v1(370,-80)
  Bottom Layer w10: -340,840 -311.18,868.82 J1.1 ; v1(-160,-680) -62.5,-680 C5.2 ; J?.1 J?.1@-150,480 ; R3.1 -155,-91.36 -146,-100.36 -134.64,-100.36 -95.5,-139.5 -89,-139.5 -80,-148.5 C7.2 -80,-171.5 -71,-180.5 -70.86,-180.5 -41.36,-210 23.97,-210 46.9,-187.06 46.9,-163.33 U1.14@49.13,-161.1 ; U1.2 -64.52,-515.98 -58.85,-521.65 -56.98,-521.65 -17.48,-561.15 U1.44 ; U1.7@-82.76,-355.98 -80.53,-353.75 -56.8,-353.75 -38.23,-335.19 -38.23,-213.27 ; U1.34@301.1,-613.86 301.1,-614.62 306.49,-620 360,-620 C6.2 ; U1.24 344.52,-264.02 338.85,-258.35 336.98,-258.35 320.07,-241.43 320.07,-223.6 336.98,-206.69 364.14,-206.69 370,-200.84 C8.2
  Bottom Layer w25: C4.2@-411,-542.5 -466.78,-542.5 -620,-389.28 -620,-173.84 -740.38,-53.45 -740.38,179.62 -360.99,559.01 -360.99,819.01 -340,840 ; C4.2 -398.5,-544 -379.07,-544 -297.26,-625.81 -241.31,-681.75 v1@-161.75,-681.75 ; v1(-155.95,21.21) -155.48,20.74 -155.48,-79.52 R3.1 ; C5.2 -51.74,-682.5 -50.24,-681 -50.24,-638.31 -28.31,-616.38 ; v1(360,-690) 360,-620 360,-617.5 C6.2 364,-621.5 C6.2@364,-633
  Bottom Layer w28: C8.2 v1(370,-80)
  Bottom Layer w30: v1(-150,390) J?.1@-150,480
XT_N: C2.2 U1.17 Y1.2 | length 306.8
  Bottom Layer w10: C2.2@200,110 C2.2@210,100
  Bottom Layer w21: U1.17 140,-118.56 209.37,-49.2 209.37,19.37 Y1.2 C2.2@210,100
XT_P: C1.2 U1.16 Y1.1 | length 290.4
  Bottom Layer w21: C1.2 50,-59.58 108.5,-118.09 U1.16
pads on no net: J1.4 S1. S2. S3. S4. S5. S6. S7. S8. S9. S10. S11. S12. S13. S14. S15. S16. S17. S18. S19. S20. S21. S22. S23. S24. S25. S26. S27. S28. S29. S30. S31. S32. S33. S34. S35. S36. S37. S38. S39. S40. S41. S42. S43. S44. S45. S46. S47. S48. S49. S50. S51. S52. S53. S54. S55. S56. S57. S58. S59. S60. S61. U1.1 U1.12 U1.18 U1.19 U1.20 U1.21 U1.22 U1.25 U1.26 U1.27 U1.28 U1.29 U1.30 U1.31 U1.32 U1.36 U1.37 U1.38 U1.39 U1.40 U1.41 U1.42

## Polygon pours and split planes (outlines as drawn)
GND on Top Layer "NONET_L-01_P-001" (solid, remove dead copper, pour order 0): -1093.24,1284.81 10248.57,1270.16 10248.57,-2795.26 -1093.24,-2717.54

## Silkscreen, mask and mechanical layers (free items; w line width, h text height)
Mechanical 2:
  drawing of 323 lines, arcs and shapes, not listed
Mechanical 3:
  the board outline again, w0.5

## Text inside footprints (layer, text, board x,y; h text height)
J?: Bottom Overlay "_RST" at 452.49,410 h30 r90; Bottom Overlay "VCC" at -145,410 h30 r90; Bottom Overlay "GND" at -45.01,410 h30 r90; Bottom Overlay "SS" at 54.99,410 h30 r90; Bottom Overlay "SCLK" at 154.99,410 h30 r90; Bottom Overlay "MISO" at 354.99,410 h30 r90; Bottom Overlay "MOSI" at 254.99,410 h30 r90
U1: Mechanical 1 "GND" at 294.34,-226.62 h11.81 r180; Mechanical 1 "AVCC" at 282.53,-258.11 h11.81 r180; Mechanical 1 "RESET_" at 18.94,-204.17 h11.81 r90; Mechanical 1 "VCC" at 51.42,-204.17 h11.81 r90; Mechanical 1 "GND" at 82.91,-204.17 h11.81 r90; Mechanical 1 "XTAL2" at 114.41,-204.17 h11.81 r90; Mechanical 1 "XTAL1" at 145.9,-204.17 h11.81 r90; Mechanical 1 "AREF" at 51.42,-532.53 h11.81 r90; Mechanical 1 "GND" at 271.89,-544.34 h11.81 r90; Mechanical 1 "VCC" at 303.38,-544.34 h11.81 r90; Mechanical 1 "GND" at 19.92,-544.34 h11.81 r90; Mechanical 1 "AVCC" at -11.57,-532.53 h11.81 r90; Mechanical 1 "UVCC" at -45.83,-510.08 h11.81 r180; Mechanical 1 "D-" at -45.83,-478.58 h11.81 r180; Mechanical 1 "D+" at -45.83,-447.09 h11.81 r180; Mechanical 1 "UGND" at -45.83,-415.59 h11.81 r180; Mechanical 1 "UCAP" at -45.83,-384.1 h11.81 r180; Mechanical 1 "VBUS" at -45.83,-352.6 h11.81 r180; Mechanical 1 "SS" at -45.83,-321.1 h11.81 r180; Mechanical 1 "SCLK" at -45.83,-289.61 h11.81 r180; Mechanical 1 "MOSI" at -45.83,-258.11 h11.81 r180; Mechanical 1 "MISO" at -45.83,-226.62 h11.81 r180